# Altium PCB UmbilicalBoardV5.PcbDoc
Units mm, origin at the board's own origin, x right, y up, seen from the top; angles counter-clockwise.
Board outline 88.77 x 92.99 mm, 4 copper layers (Top Layer, GndPlane, PowerPlane, Bottom Layer), stack 0.107 mm thick; 25 components, 60 nets, 225 pads, 4 vias.
Unrouted connection lines stored in the file: 70.
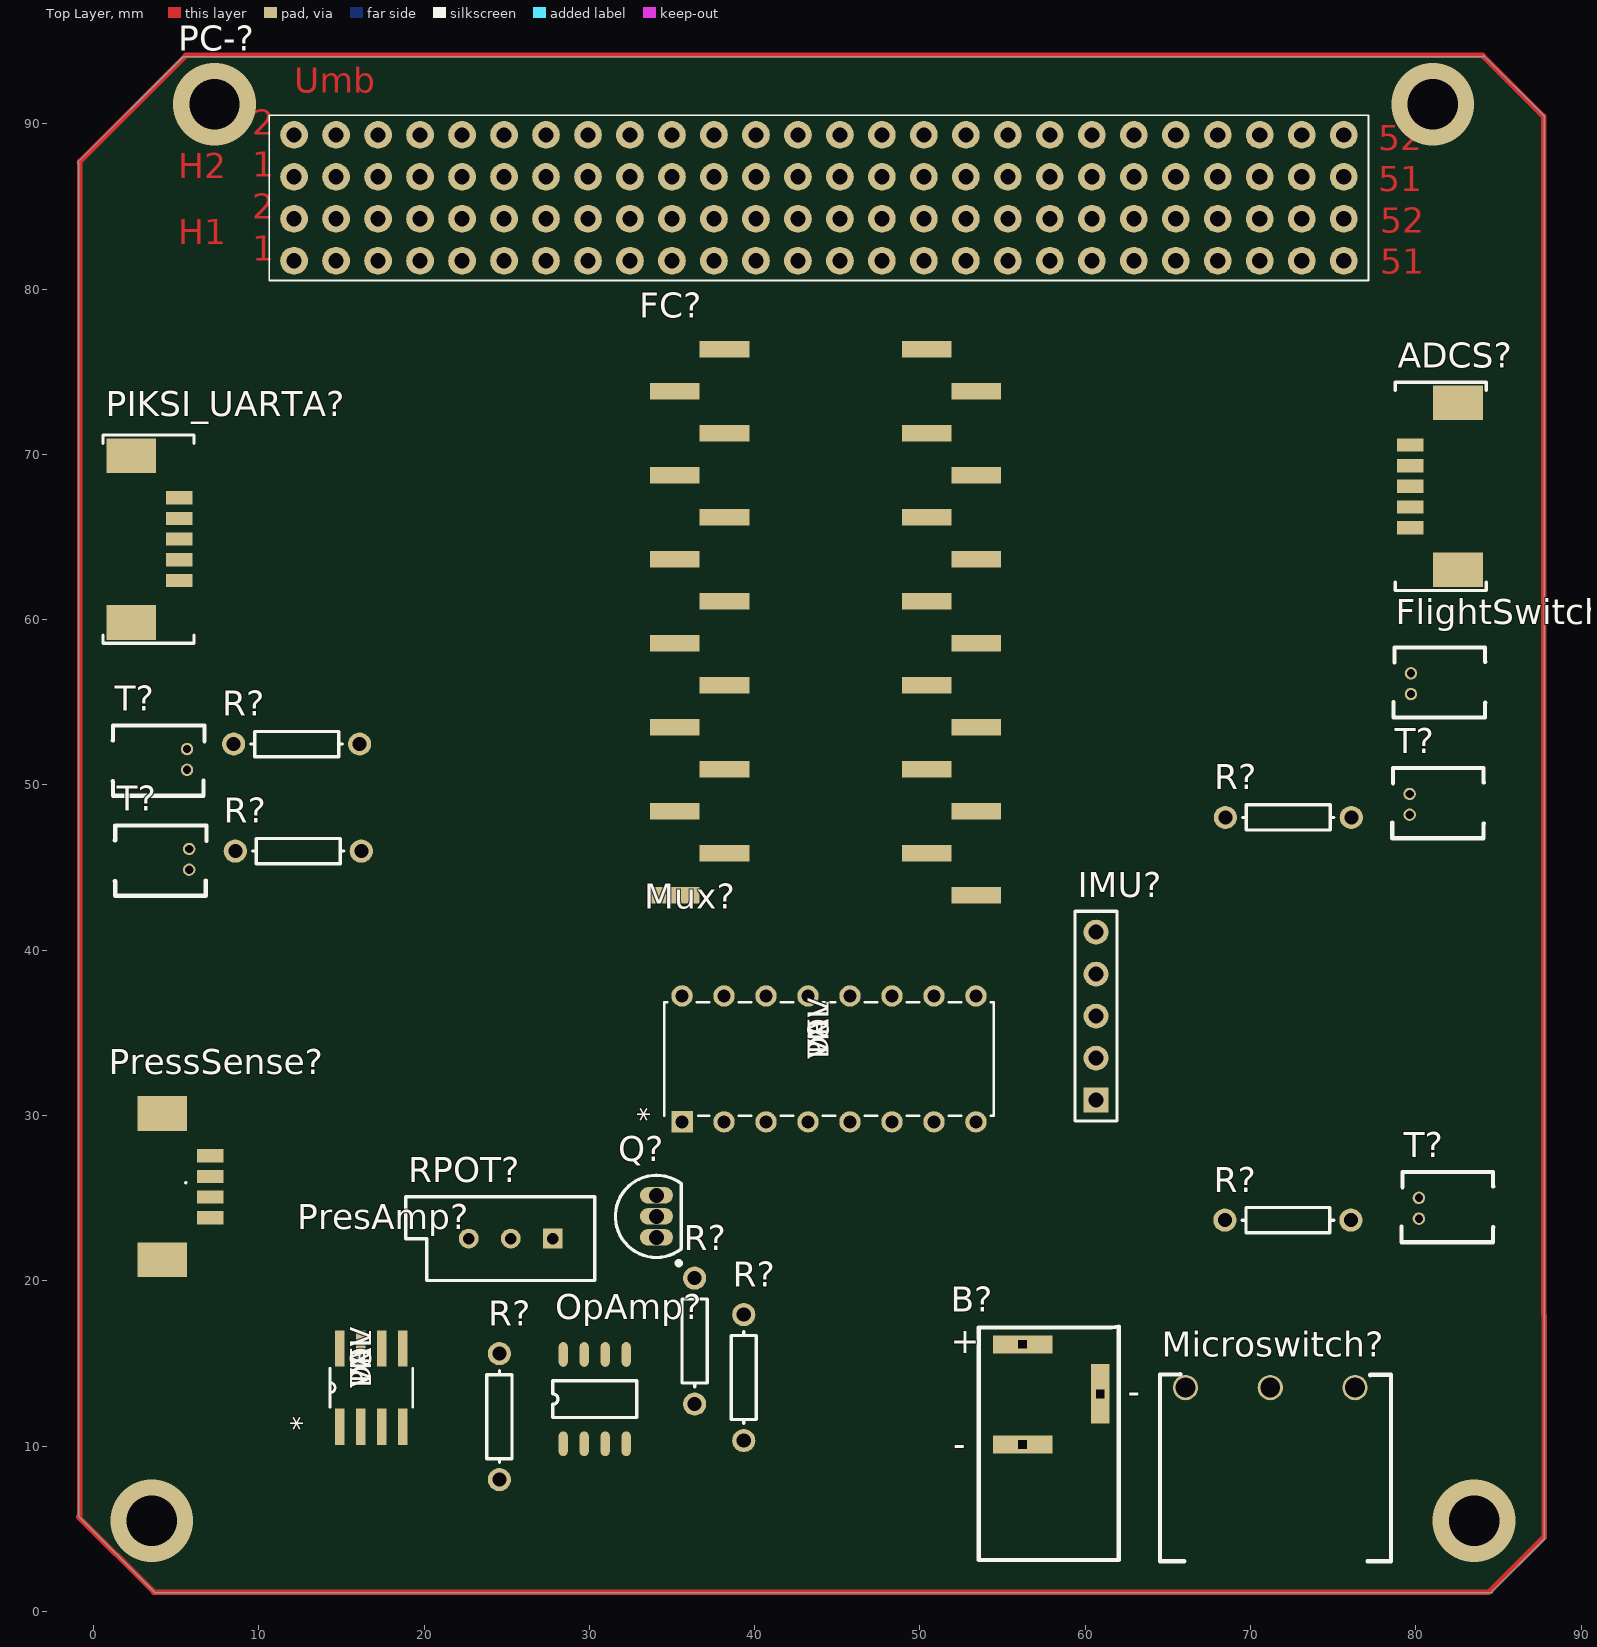
[diagram p0: Top Layer view]
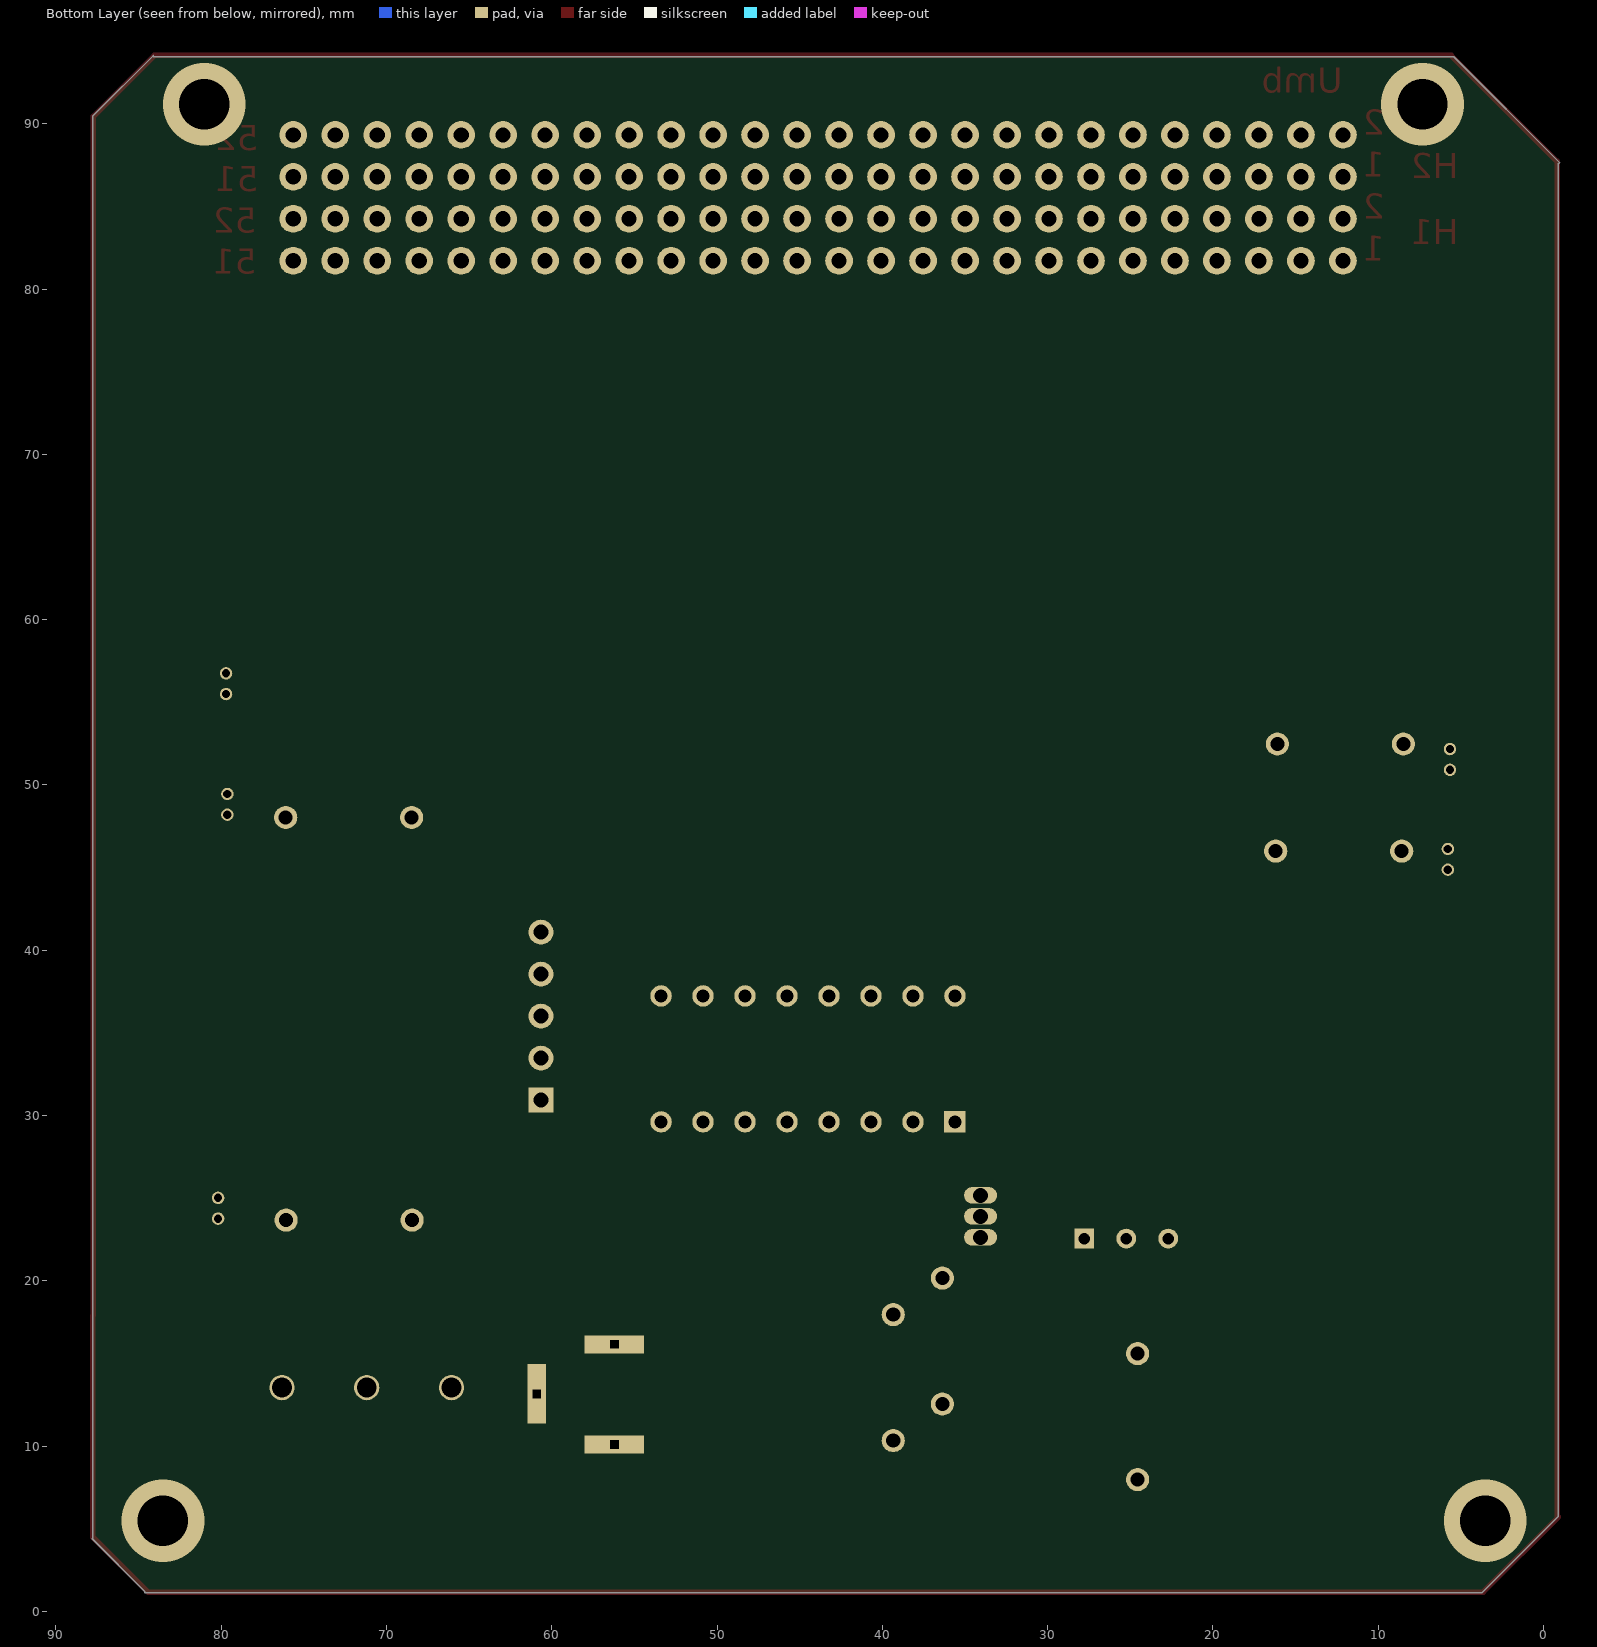
[diagram p1: Bottom Layer view, seen from below]
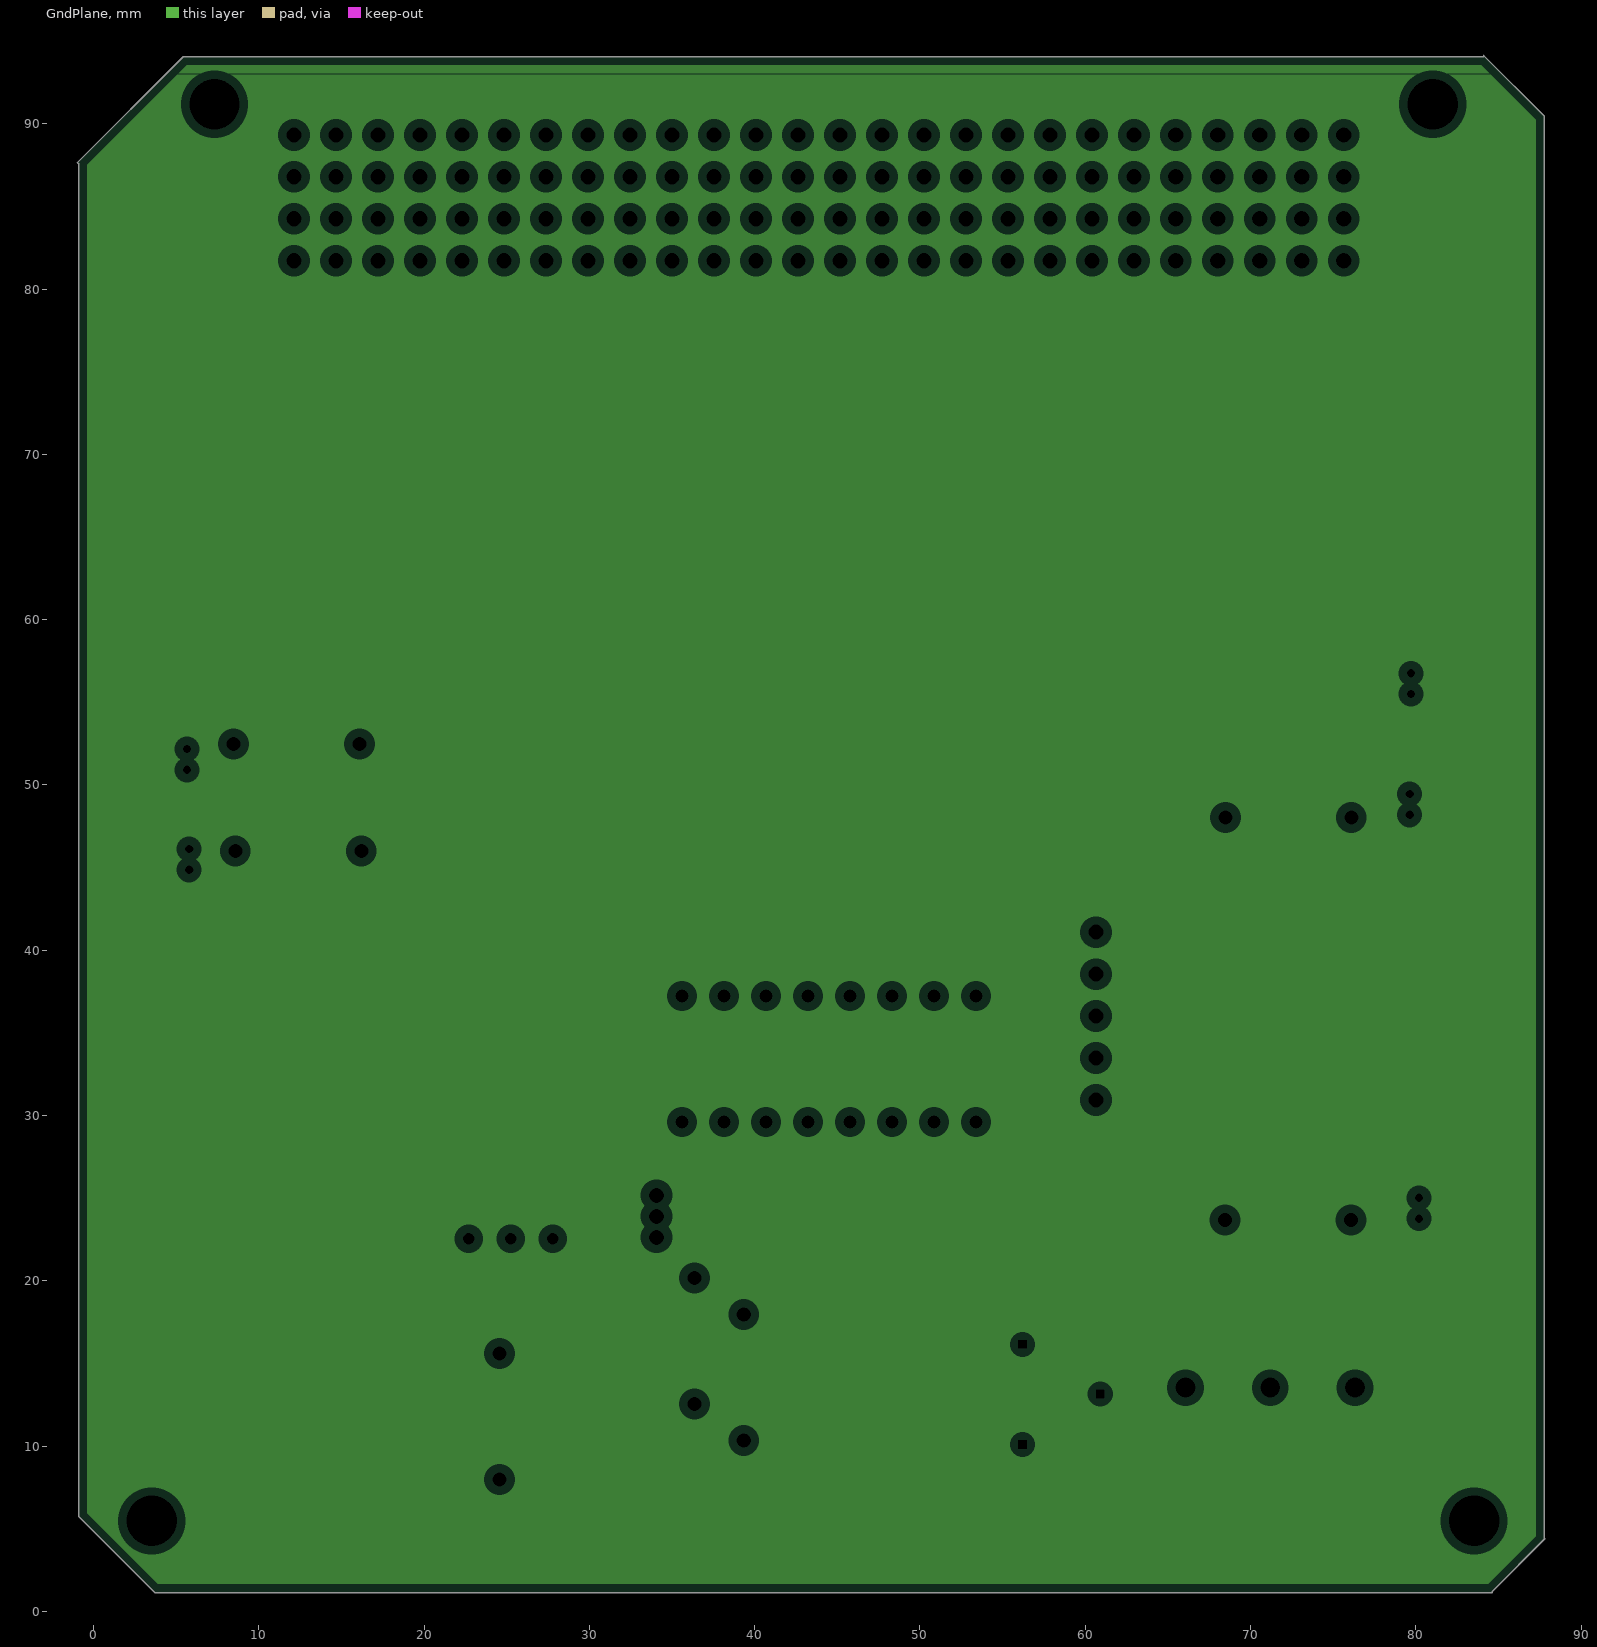
[diagram p2: GndPlane, clearances drawn from the general rule]
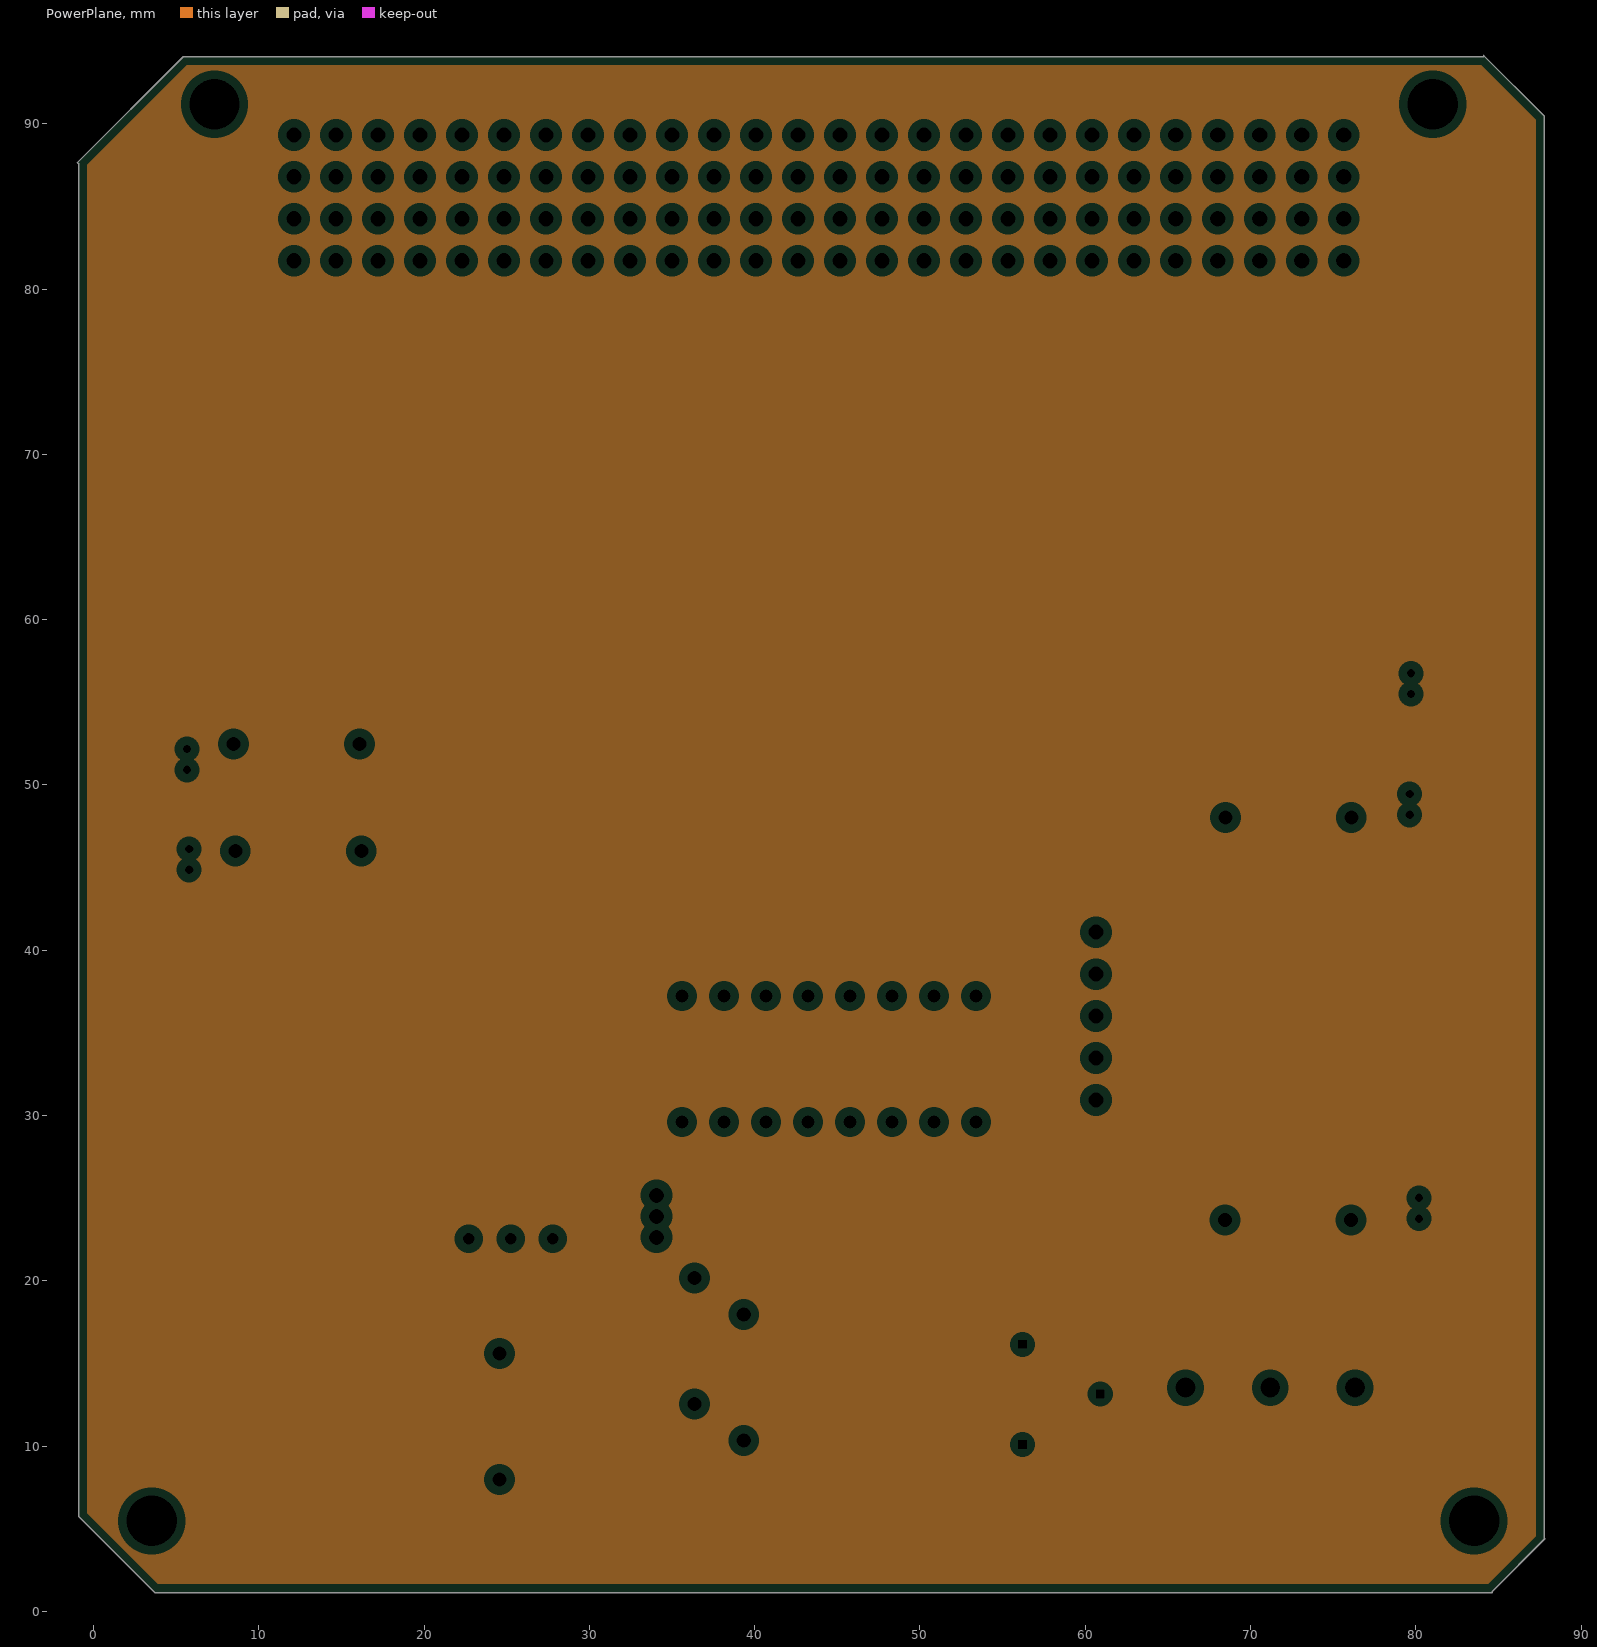
[diagram p3: PowerPlane, clearances drawn from the general rule]

## Layer stack, top to bottom
Top Solder: solder mask 0.0102, Solder Resist, Dk 3.5
Top Layer: signal copper 0.0356
GndPlane: plane copper 0.0178
PowerPlane: plane copper 0.0178
Bottom Layer: signal copper 0.0356
Bottom Solder: solder mask 0.0102, Solder Resist, Dk 3.5

## Board outline
84.099,94.132 87.782,90.449 87.782,4.42 87.808,4.394 84.633,1.219 84.633,1.143 3.708,1.143 -0.889,5.74 -0.889,87.579 -0.965,87.655 5.436,94.056 84.099,94.056

## Design rules (kind name [scope] priority, off if disabled: settings)
Clearance [All] p1: gap=0.254 ignorepadtopadclearanceinfootprint=FALSE except(0: Arc-Hole Track-Hole SMDPad-Hole THPad-Hole Via-Hole Fill-Hole Poly-Hole Region-Hole Text-Hole; 0.127: Track-Track Track-SMDPad Track-THPad SMDPad-SMDPad SMDPad-THPad THPad-THPad)
HoleSize [All] p1: absolutevalues=TRUE maxlimit=3.048 minlimit=0.025 maxpercent=80.000 minpercent=20.000
MinimumSolderMaskSliver [All] p1: minsoldermaskwidth=0.127
PlaneClearance [All] p1: clearance=0.508
PlaneConnect [All] p1: planeconnectstyle=Direct reliefexpansion=0.508 reliefentries=4 reliefconductorwidth=0.254 reliefairgap=0.254
PolygonConnect [All] p1: connectstyle=Direct reliefconductorwidth=0.254 reliefentries=4 polygonreliefangle="90 Angle" airgapwidth=0.254
RoutingVias [All] p1: holewidth=0.711 width=1.27 viastyle="Through Hole" minholewidth=0.711 minwidth=1.27 maxholewidth=0.711 maxwidth=1.27
SilkToSolderMaskClearance [IsPad] p1: minsilkscreentomaskgap=0.05 clearancetoexposedcopper=TRUE
SolderMaskExpansion [All] p1: expansion=0.102
Width [All] p1: maxlimit=0.559 minlimit=0.305 preferedwidth=0.33
25 further rules are at their usual default settings.

## Classes and differential pairs
component class AdapterBoard: ADCS? B? FC? FlightSwitch? IMU? Microswitch? Mux? OpAmp? PC-? PIKSI_UARTA? PresAmp? PressSense? Q? R? RPOT? T?

## Components (designator, comment, footprint, x,y, rotation, side; value= is the part's Value field where it differs from the comment)
ADCS? "ADCS" "Molex Picoblade 5 Pin" 84.054,61.967 r90 top
B? "Barrel_Jack" Barrel_Jack 56.209,10.107 r0 top
FC? "Teensy 3.2 Headers" "Teensy 3.2 SMD Headers" 35.179,76.352 r0 top
FlightSwitch? "RemoverBeforeFlightSwitch" "RemoverBeforeFlight Switch" 79.705,53.549 r90 top
IMU? "Header 5" HDR1X5 60.655,30.937 r90 top
Microswitch? "MicroSwitch" MicroSwitch_3pin 71.246,13.588 r180 top
Mux? "CD74HC4051E" N16 53.391,37.236 r90 top value=Value
OpAmp? "UA741" UA741 28.423,10.145 r90 top
PC-? "PC-104" PC-104FOOTPRINT 12.141,81.712 r0 top
PIKSI_UARTA? "PIKSI_UART Connector" "Molex Picoblade 5 Pin" 0.782,70.972 r270 top
PresAmp? "AD627ARZ" R_8 16.815,13.538 r90 top value=Value
PressSense? "Connector 4POS Molex PicoBlade" 532610471 7.061,23.82 r0 top
Q? "2N3906" TO-92A 34.061,23.901 r0 top
R? "Resistor" AXIAL-0.3 72.288,48.031 r0 top value=1K
R? "Resistor" AXIAL-0.3 12.395,45.999 r180 top value=1K
R? "Resistor" AXIAL-0.3 72.263,23.673 r0 top value=1K
R? "Resistor" AXIAL-0.3 12.294,52.476 r180 top value=1K
R? "1000" AXIAL-0.3 24.562,11.786 r90 top value=Res
R? "1000" AXIAL-0.3 36.373,16.358 r90 top value=Res
R? "1000" AXIAL-0.3 39.345,14.148 r90 top value=Res
RPOT? "100K" VR5 25.248,22.555 r180 top value=1K
T? "TempSensor1" "RemoverBeforeFlight Switch" 79.629,46.249 r90 top
T? "TempSensor2" "RemoverBeforeFlight Switch" 5.791,48.076 r270 top
T? "TempSensor3" "RemoverBeforeFlight Switch" 80.188,21.814 r90 top
T? "TempSensor4" "RemoverBeforeFlight Switch" 5.664,54.122 r270 top

## Footprints (in the part's own frame and the unit in brackets; to place one, negate y for a bottom-side part, rotate by r counter-clockwise, add the part's x,y. Pads: shape width x height; smd on the part's side, far side on the other; paste and mask are expansions set on the pad)
532610471 [mm] "Connector 4POS Molex PicoBlade"
  rect 1.6x0.8 smd: 1(0,3.75) 2(0,2.5) 3(0,1.25) 4(0,0)
  rect 3x2.1 smd: ""(-2.9,-2.55) ""(-2.9,6.3)
  silkscreen extent -1.52,2.07 -1.42,2.17, body extent -4.71,-3.81 1.02,7.56, height 0.6
AXIAL-0.3 [mm] "Axial Device, Thru-Hole; 2 Leads; 0.3 in Pin Spacing"
  round 1.4 hole 0.85: 1(-3.81,0) 2(3.81,0)
  silkscreen extent -2.77,-0.76 2.77,0.76
Barrel_Jack [mm] "KLDX-0202-B"
  rect 3.6x1.1 hole 0.5 square: 0(0,0) 2(0,6.05)
  rect 1.1x3.6 hole 0.5 square: 1(4.7,3.05)
  silkscreen extent -2.65,-7 5.82,7.12
HDR1X5 [mm] "Connector; Header; 5 Position"
  rect 1.5x1.5 hole 0.9: 1(0,0)
  round 1.5 hole 0.9: 2(2.54,0) 3(5.08,0) 4(7.62,0) 5(10.16,0)
  silkscreen extent -1.27,-1.27 11.43,1.27
MicroSwitch_3pin [mm] "Omron Electronics Inc-EMC Div D2FS-FL-N-A1"
  round 1.524 hole 1.2: 1(-5.08,0.05) 2(0.05,0.05) 3(5.18,0.05)
  silkscreen extent -7.25,-0.77 6.73,10.55, body extent -7.25,-0.75 6.73,10.55
"Molex Picoblade 5 Pin" [mm] "Molex Picoblade Header, SMT, Right Angle  53261-0571"
  rect 0.8x1.6 smd: 0(3.6,4.4) 1(4.85,4.4) 2(6.1,4.4) 3(7.35,4.4) 4(8.6,4.4)
  rect 2.1x3 smd: 5(1.05,1.5) 6(11.15,1.5)
  silkscreen extent -0.2,-0.2 12.4,5.3, body extent 0.4,0 11.8,5.2, height 3.4
N16 [mil]
  rect 51x51 / inner round 60 / far side rect 51x51 hole 31: 1(-300,700)
  round 51 / inner round 60 / far side round 51 hole 31: 2(-300,600) 3(-300,500) 4(-300,400) 5(-300,300) 6(-300,200) 7(-300,100) 8(-300,0) 9(0,0) 10(0,100) 11(0,200) 12(0,300) 13(0,400) 14(0,500) 15(0,600) 16(0,700)
  silkscreen extent -285,-43 -15,742, body extent 0,0 10,10, height 10
PC-104FOOTPRINT [mm]
  round 1.676 hole 0.914 mask+0.076: H1_1(0,0) H1_2(0,2.54) H1_3(2.54,0) H1_4(2.54,2.54) H1_5(5.08,0) H1_6(5.08,2.54) H1_7(7.62,0) H1_8(7.62,2.54) H1_9(10.16,0) H1_10(10.16,2.54) H1_11(12.7,0) H1_12(12.7,2.54) H1_13(15.24,0) H1_14(15.24,2.54) H1_15(17.78,0) H1_16(17.78,2.54) H1_17(20.32,0) H1_18(20.32,2.54) H1_19(22.86,0) H1_20(22.86,2.54) H1_21(25.4,0) H1_22(25.4,2.54) H1_23(27.94,0) H1_24(27.94,2.54) H1_25(30.48,0) H1_26(30.48,2.54) H1_27(33.02,0) H1_28(33.02,2.54) H1_29(35.56,0) H1_30(35.56,2.54) H1_31(38.1,0) H1_32(38.1,2.54) H1_33(40.64,0) H1_34(40.64,2.54) H1_35(43.18,0) H1_36(43.18,2.54) H1_37(45.72,0) H1_38(45.72,2.54) H1_39(48.26,0) H1_40(48.26,2.54) H1_41(50.8,0) H1_42(50.8,2.54) H1_43(53.34,0) H1_44(53.34,2.54) H1_45(55.88,0) H1_46(55.88,2.54) H1_47(58.42,0) H1_48(58.42,2.54) H1_49(60.96,0) H1_50(60.96,2.54) H1_51(63.5,0) H1_52(63.5,2.54) H2_1(0,5.08) H2_2(0,7.62) H2_3(2.54,5.08) H2_4(2.54,7.62) H2_5(5.08,5.08) H2_6(5.08,7.62) H2_7(7.62,5.08) H2_8(7.62,7.62) H2_9(10.16,5.08) H2_10(10.16,7.62) H2_11(12.7,5.08) H2_12(12.7,7.62) H2_13(15.24,5.08) H2_14(15.24,7.62) H2_15(17.78,5.08) H2_16(17.78,7.62) H2_17(20.32,5.08) H2_18(20.32,7.62) H2_19(22.86,5.08) H2_20(22.86,7.62) H2_21(25.4,5.08) H2_22(25.4,7.62) H2_23(27.94,5.08) H2_24(27.94,7.62) H2_25(30.48,5.08) H2_26(30.48,7.62) H2_27(33.02,5.08) H2_28(33.02,7.62) H2_29(35.56,5.08) H2_30(35.56,7.62) H2_31(38.1,5.08) H2_32(38.1,7.62) H2_33(40.64,5.08) H2_34(40.64,7.62) H2_35(43.18,5.08) H2_36(43.18,7.62) H2_37(45.72,5.08) H2_38(45.72,7.62) H2_39(48.26,5.08) H2_40(48.26,7.62) H2_41(50.8,5.08) H2_42(50.8,7.62) H2_43(53.34,5.08) H2_44(53.34,7.62) H2_45(55.88,5.08) H2_46(55.88,7.62) H2_47(58.42,5.08) H2_48(58.42,7.62) H2_49(60.96,5.08) H2_50(60.96,7.62) H2_51(63.5,5.08) H2_52(63.5,7.62)
  silkscreen extent -1.5,-1.19 65,8.81
R_8 [mil]
  rect 86x22 smd: 1(-93,75) 2(-93,25) 3(-93,-25) 4(-93,-75) 5(93,-75) 6(93,-25) 7(93,25) 8(93,75)
  silkscreen extent -46,-98 46,98
"RemoverBeforeFlight Switch" [mm] "Molex Picoblade Part Number: 53048-0210"
  round 0.75 hole 0.5: 1(1.95,0) 2(3.205,0)
  silkscreen extent 0.53,-4.5 4.78,1.05, body extent 0.53,-4.47 4.78,1.03, height 4.05
"Teensy 3.2 SMD Headers" [mm]
  rect 3x1 smd: 1(3,0) 2(0,-2.54) 3(3,-5.08) 4(0,-7.62) 5(3,-10.16) 6(0,-12.7) 7(3,-15.24) 8(0,-17.78) 9(3,-20.32) 10(0,-22.86) 11(3,-25.4) 12(0,-27.94) 13(3,-30.48) 14(0,-33.02) 20(18.24,-33.02) 21(15.24,-30.48) 22(18.24,-27.94) 23(15.24,-25.4) 24(18.24,-22.86) 25(15.24,-20.32) 26(18.24,-17.78) 27(15.24,-15.24) 28(18.24,-12.7) 29(15.24,-10.16) 30(18.24,-7.62) 31(15.24,-5.08) 32(18.24,-2.54) 33(15.24,0)
  body extent -1.09,-34.49 19.35,1.16, height 0.25
TO-92A [mm] "TO, Flat Index; 3 In-Line, Axial Leads; Body Dia. 4.5mm; Leads 0.51 x 0.48 mm (max)"
  oval 2x1 hole 0.9: 1(0,-1.27) 2(0,0) 3(0,1.27)
  silkscreen extent -2.48,-2.95 1.5,2.48, body extent -2.48,-2.5 1.5,2.5, height 6.86
UA741 [mm]
  oval 1.5x0.55 smd: 1(0,0) 2(0,-1.27) 3(0,-2.54) 4(0,-3.81) 5(5.4,-3.81) 6(5.4,-2.54) 7(5.4,-1.27) 8(5.4,0)
  silkscreen extent 1.58,-4.44 3.82,0.64
VR5 [mm] "Thru-Hole; 3 Leads"
  rect 1.2x1.2 hole 0.7: 1(-2.54,0)
  round 1.2 hole 0.7: 2(0,0) 3(2.54,0)
  silkscreen extent -5.08,-2.54 6.35,2.54

## Part data
ADCS?: library part "PIKSI_UART Connector", "Molex Picoblade 53261-0571"
FlightSwitch?: "53048-0210 Molex Picoblade"
IMU?: "Header, 5-Pin", LatestRevisionDate=17-Jul-2002, LatestRevisionNote="Re-released for DXP Platform.", Publisher="Altium Limited"
Microswitch?: "Omron Electronics Inc-EMC Div D2FS-FL-N-A1"
Mux?: "Imported", Manufacturer_Name="Texas Instruments", C="Copyright (C) 2015 Accelerated Designs. All rights reserved", Copyright="Copyright (C) 2015 Accelerated Designs. All rights reserved", Family=Unknown, Manufacturer_Part_Number=CD74HC4051E, RefDes=RefDes, RS_Part_Number=526694, Section=Unknown, Type=Type, Vendor="Texas Instruments"
PC-?: "ESQ-126-14-G-D (2 total needed)"
PIKSI_UARTA?: "Molex Picoblade 53261-0571"
PresAmp?: "Imported", Manufacturer_Part_Number=AD627ARZ, RefDes=Refdes, Type=Type, Vendor=Vendor
PressSense?: library part 532610471
Q?: "PNP General Purpose Amplifier", ComponentLink1Description="Manufacturer Link", ComponentLink1URL=http://www.fairchildsemi.com/, ComponentLink2Description=Datasheet, ComponentLink2URL=http://www.fairchildsemi.com/ds/2N%2F2N3906.pdf, DatasheetVersion=1997, LatestRevisionDate=15-Jan-2003, LatestRevisionNote="PCB Footprint 'BCY-W3/D4.7' replaced", PackageDescription="TO, Flat Index; 3 In-Line, Axial Leads; Body Dia. 4.5mm; Leads 0.51 x 0.48 mm (max)", PackageReference=TO-92A, PackageVersion=Sep-1998, Published=8-Jun-2000, Publisher="Altium Limited"
R? R? R? R?: library part Res1, LatestRevisionDate=17-Jul-2002, LatestRevisionNote="Re-released for DXP Platform.", PackageDescription="Axial Device, Thru-Hole; 2 Leads; 0.3 in Pin Spacing", PackageReference=AXIAL-0.3, Published=8-Jun-2000, Publisher="Altium Limited"
R? R? R?: library part Res1, "Resistor- 696-1552-ND", LatestRevisionDate=17-Jul-2002, LatestRevisionNote="Re-released for DXP Platform.", PackageDescription="Axial Device, Thru-Hole; 2 Leads; 0.3 in Pin Spacing", PackageReference=AXIAL-0.3, Published=8-Jun-2000, Publisher="Altium Limited"
RPOT?: library part RPot, "Potentiometer", LatestRevisionDate=17-Jul-2002, LatestRevisionNote="Re-released for DXP Platform.", PackageDescription="Variable Resistor, Thru-Hole; 3 Leads", PackageReference=VR5, Published=8-Jun-2000, Publisher="Altium Limited", Set Position=0.5, Sim Note="Enter the Resistance value and the set point into parameter fields."
T? T? T? T?: library part RemoverBeforeFlightSwitch, "53048-0210 Molex Picoblade"

## Via types
v1: diameter 5, hole 3.048, Top Layer to Bottom Layer, 4 vias

## Nets (pads, with @x,y where several pads share a name; then routed paths per layer and width w, separated by ;. In a path a pad name is that pad's centre, name@x,y a point inside that pad or via, vN(x,y) a via of type N, cw(c..) or ccw(c..) an arc to the next point about the centre after c; other vN are vias at no path point)
3.3_Valves135: PC-?.H2_28
3.3_Valves246: PC-?.H2_26
5_ADCS: ADCS?.4 PC-?.H1_50
5_mux: Mux?.16 PC-?.H2_25
5_Valves: PC-?.H1_48
5V_BattChargeIn: B?.2 PC-?.H1_32
5V_IMU: IMU?.4
5V_Piksi: PIKSI_UARTA?.5
5V_Teensy1: FC?.33 PC-?.H1_49
5V_Teensy2: PC-?.H1_51
5V_TempSensors: PC-?.H1_47 R?.1@16.104,52.476 R?.1@16.205,45.999 R?.1@68.453,23.673 R?.1@68.478,48.031
24V: ADCS?.1
24V_SAH_enable: FC?.11 PC-?.H1_31
AGND: FC?.32 PC-?.H2_31
ANALOGGND: OpAmp?.4 PresAmp?.4 PresAmp?.5 PressSense?.2
DGND: ADCS?.5 B?.0 B?.1 FC?.1 FlightSwitch?.1 IMU?.3 Microswitch?.3 Mux?.8 PC-?.H2_29 PIKSI_UARTA?.1 T?.2
Docking_BW: FC?.6 PC-?.H1_25
Docking_en: FC?.7 PC-?.H1_27
DockingFW: FC?.5 PC-?.H1_23
EPS_RX: PC-?.H2_38
EPS_TX: PC-?.H2_36
GND: RPOT?.1
Linkstar_RX: FC?.9 PC-?.H1_15
Linkstar_TX: FC?.10 PC-?.H1_13
mux1: Mux?.13 R?.2@76.073,23.673 T?.1@80.188,23.764
mux2: Mux?.14 R?.2@8.484,52.476 T?.1@5.664,52.172
mux3: Mux?.15
mux4: Mux?.12
mux5: Mux?.1 R?.2@76.098,48.031 T?.1@79.629,48.199
mux6: Mux?.5 R?.2@8.585,45.999 T?.1@5.791,46.126
mux7: Mux?.2
mux8: Mux?.4
NetFlightSwitch?_2: FlightSwitch?.2 Microswitch?.2
NetOpAmp?_2: OpAmp?.2 Q?.1 R?.2@24.562,15.596
NetOpAmp?_3: OpAmp?.3 R?.1@39.345,10.338 R?.2@36.373,20.168
NetOpAmp?_6: OpAmp?.6 Q?.2
NetPresAmp?_1: PresAmp?.1 RPOT?.2
NetPresAmp?_2: PresAmp?.2 PressSense?.4
NetPresAmp?_6: PresAmp?.6
NetPresAmp?_7: PresAmp?.7 R?.1@24.562,7.976
NetPresAmp?_8: PresAmp?.8 RPOT?.3
NetPressSense?_3: PressSense?.3 Q?.3
Piksi_RX: FC?.2 PC-?.H1_19 PIKSI_UARTA?.2
Piksi_TX: FC?.3 PC-?.H1_17 PIKSI_UARTA?.3
Pressure1: FC?.26 PC-?.H1_33
Teensy2_Reset: FC?.4
Teensy2_RX: ADCS?.2
Teensy2_SCL: FC?.23 IMU?.1 PC-?.H1_43
Teensy2_SDA: FC?.24 IMU?.2 PC-?.H1_41
Teensy2_TX: ADCS?.3
TempMux1: Mux?.11 PC-?.H1_2
TempMux2: FC?.13 Mux?.10 PC-?.H1_4
TempMux3: Mux?.9
TempMuxRead: FC?.28 Mux?.3 PC-?.H1_8
Valve1: FC?.20 PC-?.H1_1
Valve2: FC?.21 PC-?.H1_3
Valve3: FC?.22 PC-?.H1_5
Valve4: FC?.25 PC-?.H1_7
Valve5: FC?.29 PC-?.H1_9
VBatt: PC-?.H2_45 PC-?.H2_47
pads on no net: ADCS?.0 ADCS?.6 FC?.8 FC?.12 FC?.14 FC?.27 FC?.30 FC?.31 IMU?.5 Microswitch?.1 Mux?.6 Mux?.7 OpAmp?.1 OpAmp?.5 OpAmp?.7 OpAmp?.8 PC-?.H1_6 PC-?.H1_10 PC-?.H1_11 PC-?.H1_12 PC-?.H1_14 PC-?.H1_16 PC-?.H1_18 PC-?.H1_20 PC-?.H1_21 PC-?.H1_22 PC-?.H1_24 PC-?.H1_26 PC-?.H1_28 PC-?.H1_29 PC-?.H1_30 PC-?.H1_34 PC-?.H1_35 PC-?.H1_36 PC-?.H1_37 PC-?.H1_38 PC-?.H1_39 PC-?.H1_40 PC-?.H1_42 PC-?.H1_44 PC-?.H1_45 PC-?.H1_46 PC-?.H1_52 PC-?.H2_1 PC-?.H2_2 PC-?.H2_3 PC-?.H2_4 PC-?.H2_5 PC-?.H2_6 PC-?.H2_7 PC-?.H2_8 PC-?.H2_9 PC-?.H2_10 PC-?.H2_11 PC-?.H2_12 PC-?.H2_13 PC-?.H2_14 PC-?.H2_15 PC-?.H2_16 PC-?.H2_17 PC-?.H2_18 PC-?.H2_19 PC-?.H2_20 PC-?.H2_21 PC-?.H2_22 PC-?.H2_23 PC-?.H2_24 PC-?.H2_27 PC-?.H2_30 PC-?.H2_32 PC-?.H2_33 PC-?.H2_34 PC-?.H2_35 PC-?.H2_37 PC-?.H2_39 PC-?.H2_40 PC-?.H2_41 PC-?.H2_42 PC-?.H2_43 PC-?.H2_44 PC-?.H2_46 PC-?.H2_48 PC-?.H2_49 PC-?.H2_50 PC-?.H2_51 PC-?.H2_52 PIKSI_UARTA?.0 PIKSI_UARTA?.4 PIKSI_UARTA?.6 PresAmp?.3 PressSense?. PressSense?.1 R?.1@36.373,12.548 R?.2@39.345,17.958
copper on no net: | length 352.7
  Top Layer w0.33: -0.889,5.715 3.658,1.168 84.43,1.168 87.681,4.42 87.759,4.497 87.759,17.888 87.732,17.915 87.732,90.449 84.049,94.132 5.588,94.132 -0.813,87.732 -0.813,5.664
  other v1: 3.526,5.479 83.526,5.479 7.326,91.179 81.026,91.179

## Polygon pours and split planes (outlines as drawn)
no net on GndPlane (split plane): 87.272,90.238 87.272,4.58 84.345,1.653 3.92,1.653 -0.379,5.952 -0.379,87.52 5.647,93.546 83.964,93.546
no net on PowerPlane (split plane): 87.272,90.238 87.272,4.58 84.345,1.653 3.92,1.653 -0.379,5.952 -0.379,87.52 5.647,93.546 83.964,93.546

## Other copper
GndPlane (plane layer: these items are gaps in the copper):
  lines w0: 4.978,93.04 86.919,93.04
  lines w0.254: 88.443,42.57 88.697,42.824

## Silkscreen, mask and mechanical layers (free items; w line width, h text height)
Top Overlay:
  rectangle: 100.686,18.821 105.562,23.266
  text "Cornell  / Umbilical Board  / Rev 2.1" at 100.813,23.698 h1.52
Mechanical 1:
  rectangle: 59.538,29.718 84.938,42.418
Drill Drawing:
  text ".Legend" at 67.386,-4.216 h1.52

## Text inside footprints (layer, text, board x,y; h text height)
B?: Top Overlay "+" at 51.859,15.607 h1.52; Top Overlay "-" at 62.584,12.557 h1.52; Top Overlay "-" at 52.009,9.382 h1.52
Mux?: Top Overlay "TOL" at 44.501,33.426 h1.27 r90; Top Overlay "VAL" at 44.501,33.426 h1.27 r90; Top Overlay "DEV" at 44.501,33.426 h1.27 r90; Top Overlay "PN" at 44.501,33.426 h1.27 r90; Top Overlay "*" at 34.201,29.616 h1.27 r90; Dimensions "RefDes2" at 44.501,33.426 h1.27 r90; Dimensions "*" at 35.611,30.378 h1.27 r90
PC-?: Top Layer "Umb" at 12.141,91.872 h1.52; Top Layer "H1" at 5.141,82.712 h1.52; Top Layer "H2" at 5.141,86.712 h1.52; Top Layer "1" at 9.601,81.712 h1.52; Top Layer "2" at 9.601,84.252 h1.52; Top Layer "1" at 9.601,86.792 h1.52; Top Layer "2" at 9.601,89.332 h1.52; Top Layer "51" at 77.841,80.912 h1.52; Top Layer "52" at 77.841,83.412 h1.52; Top Layer "51" at 77.741,85.912 h1.52; Top Layer "52" at 77.741,88.412 h1.52; Mechanical 1 "J1" at 51.548,85.606 h0.76
PresAmp?: Top Overlay "*" at 13.208,10.922 h1.27 r90; Top Overlay "PN" at 16.815,13.538 h1.27 r90; Top Overlay "DEV" at 16.815,13.538 h1.27 r90; Top Overlay "VAL" at 16.815,13.538 h1.27 r90; Top Overlay "TOL" at 16.815,13.538 h1.27 r90; Dimensions "*" at 13.208,10.922 h1.27 r90; Dimensions "RefDes2" at 16.815,13.538 h1.27 r90